# Altium PCB MotorCtrPCB.PcbDoc
Units mil, origin at the board's own origin, x right, y up, seen from the top; angles counter-clockwise.
Board outline 2560 x 980 mil, 2 copper layers (Top Layer, Bottom Layer); 38 components, 27 nets, 135 pads, 14 vias.
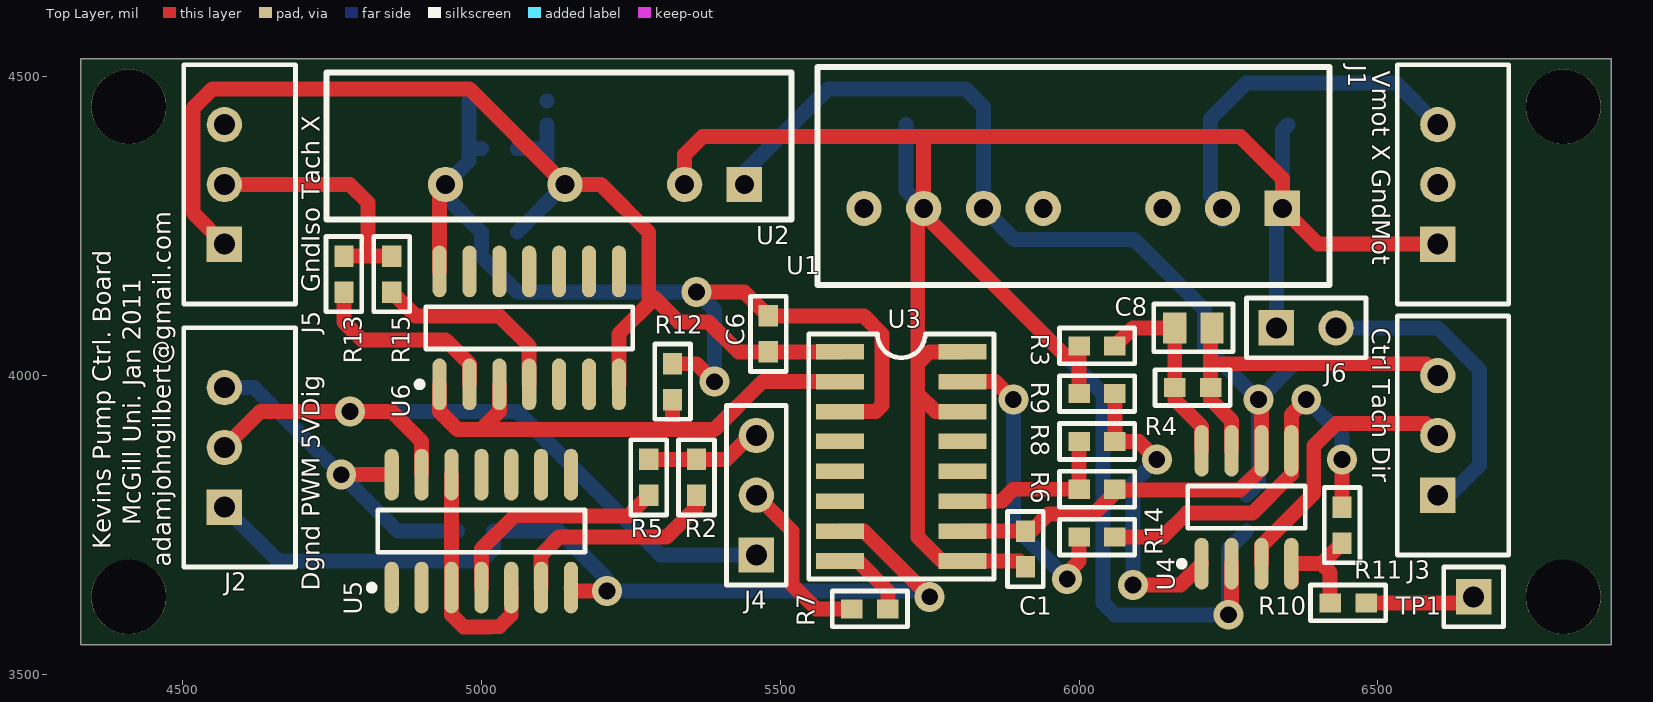
[diagram p0: Top Layer view]
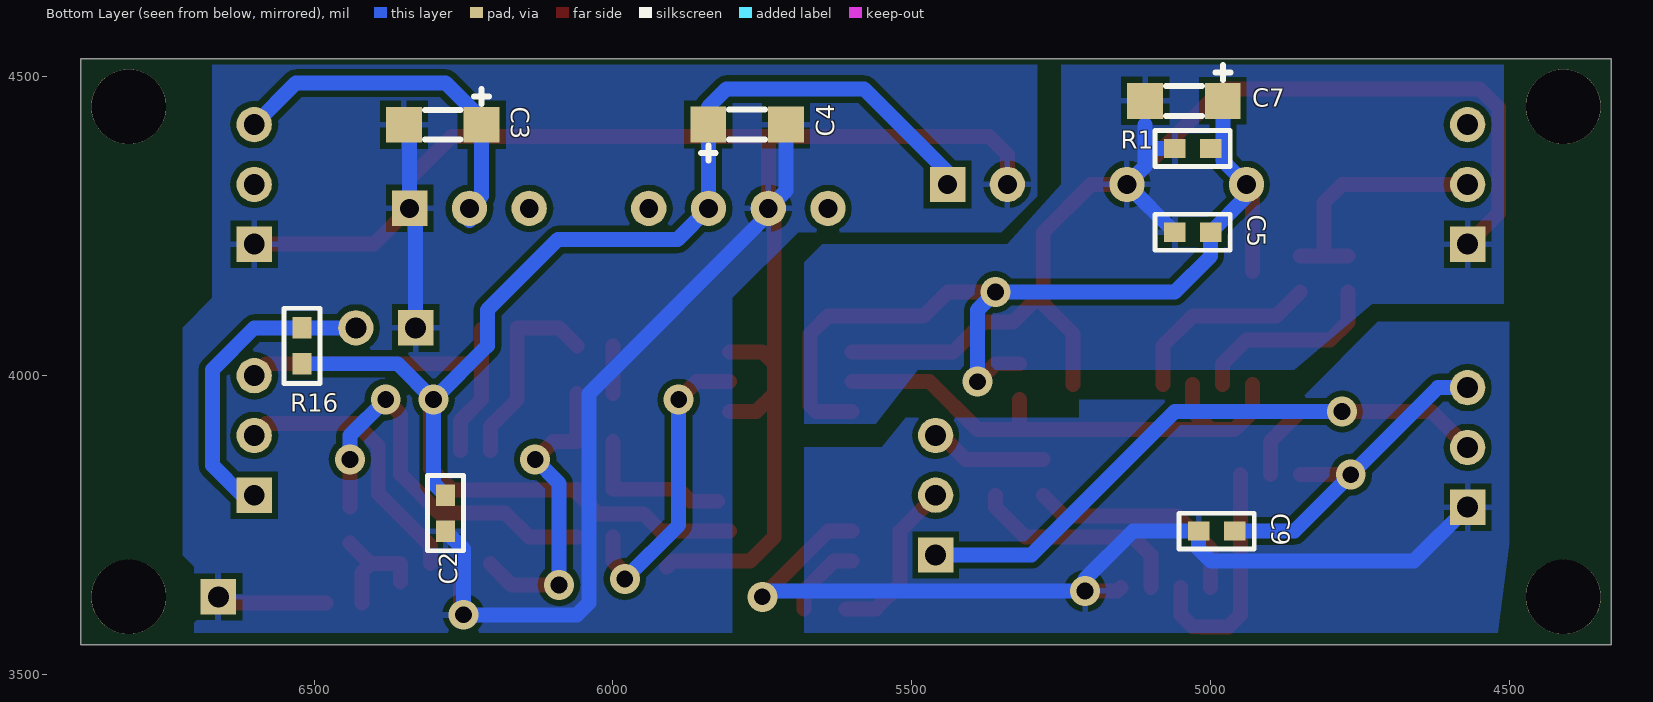
[diagram p1: Bottom Layer view, seen from below]

## Layer stack, top to bottom
Top Layer: signal copper 1.4
Dielectric: dielectric 12.6, FR-4, Dk 4.8
Bottom Layer: signal copper 1.4

## Board outline
4330,4530 4330,3550 6890,3550 6890,4530 4330,4530

## Design rules (kind name [scope] priority, off if disabled: settings)
Clearance [All] p1: gap=10
HoleSize [All] p1: absolutevalues=TRUE maxlimit=200 minlimit=1 maxpercent=80.000 minpercent=20.000
MinimumSolderMaskSliver [All] p1: minsoldermaskwidth=0
PolygonConnect [All] p1: connectstyle=Relief reliefconductorwidth=10 reliefentries=4 polygonreliefangle="90 Angle"
RoomDefinition MotorCtrl [InComponentClass('MotorCtrl')] p1: confinementstyle=ConfineIn formatcopy=TRUE lockcomponents=FALSE outline 4260,3490 6940,3490 6940,4580 4260,4580
RoutingVias [All] p1: holewidth=28 width=50 viastyle="Through Hole" minholewidth=28 minwidth=50 maxholewidth=28 maxwidth=50
SilkToSilkClearance [All] p1: silktosilkclearance=0
SilkscreenOverComponentPads [All] p1: minsilkscreentomaskgap=0
SolderMaskExpansion [All] p1: expansion=4
Width [All] p1: maxlimit=100 minlimit=10 preferedwidth=25
24 further rules are at their usual default settings.

## Components (designator, comment, footprint, x,y, rotation, side; value= is the part's Value field where it differs from the comment)
C1 "0.01uF" 0603 5910,3680 r90 top
C2 "0.01uF" 0603 6280,3740 r90 bottom
C3 "1uF x 50V" TANTA 6220,4420 r0 bottom
C4 "1uF x 50V" TANTA 5840,4420 r180 bottom
C5 "0.01uF" 0603 5060,4240 r180 bottom
C6 "0.01uF" 0603 5480,4040 r90 top
C7 "1uF x 50V" TANTA 4980,4460 r0 bottom
C8 "10uF" 0805 6160,4080 r0 top
C9 "0.01uF" 0603 5020,3740 r180 bottom
J1 "MolexHDR3" HDR1X3_MolexVertical 6600,4220 r90 top
J2 "MolexHDR3" HDR1X3_MolexVertical 4570,3780 r90 top
J3 "MolexHDR3" HDR1X3_MolexVertical 6600,3800 r90 top
J4 "Header 3" HDR1X3 5460,3700 r90 top
J5 "MolexHDR3" HDR1X3_MolexVertical 4570,4220 r90 top
J6 "Header2" HDR1X2 6330,4080 r0 top
R1 "Res0603" 0603 5000,4380 r0 bottom
R2 "Res0603" 0603 5360,3800 r90 top
R3 "Res0603" 0603 6000,4050 r0 top
R4 "Res0603" 0603 6160,3980 r0 top
R5 "Res0603" 0603 5280,3800 r90 top
R6 "Res0603" 0603 6000,3810 r0 top
R7 "Res0603" 0603 5680,3610 r180 top
R8 "Res0603" 0603 6000,3890 r0 top
R9 "Res0603" 0603 6000,3970 r0 top
R10 "Res0603" 0603 6420,3620 r0 top
R11 "Res0603" 0603 6440,3780 r270 top
R12 "Res0603" 0603 5320,3960 r90 top
R13 "Res0603" 0603 4770,4200 r270 top
R14 "Res0603" 0603 6000,3730 r0 top
R15 "Res0603" 0603 4850,4200 r270 top
R16 "Res0603" 0603 6520,4080 r270 bottom
TP1 "Header1" HDR1 6660,3630 r90 top
U1 "Isolated24V-5VDCDC Recom RS-2405S" RECOM_RS-2405S 6340,4280 r180 top
U2 "Isolated5VDCDC Recom RE-0505S" RECOM_DCDC_SIP 5440,4320 r180 top
U3 "ACSL-6410" SO16 5600,4040 r0 top
U4 "LT1013IS8" S8_N 6280,3780 r90 top
U5 "SN74AC04D" D014_N 5000,3740 r90 top
U6 "SN74AC04D" D014_N 5080,4080 r90 top

## Footprints (in the part's own frame and the unit in brackets; to place one, negate y for a bottom-side part, rotate by r counter-clockwise, add the part's x,y. Pads: shape width x height; smd on the part's side, far side on the other; paste and mask are expansions set on the pad)
0603 [mil]
  rect 36x32 smd: 1(0,0) 2(60,0)
  silkscreen extent -33,-30 93,30
0805 [mil]
  rect 38.5x52 smd: 1(0,0) 2(62.5,0)
  silkscreen extent -35,-40 98,40
D014_N [mm] "SOIC, 14-Leads, Body 8.7x3.9mm, Pitch 1.27mm, IPC Medium Density"
  oval 2.2x0.6 smd: 1(-2.4,3.81) 2(-2.4,2.54) 3(-2.4,1.27) 4(-2.4,0) 5(-2.4,-1.27) 6(-2.4,-2.54) 7(-2.4,-3.81) 8(2.4,-3.81) 9(2.4,-2.54) 10(2.4,-1.27) 11(2.4,0) 12(2.4,1.27) 13(2.4,2.54) 14(2.4,3.81)
  silkscreen extent -2.52,-4.4 0.9,4.78, body extent -1.95,-4.33 1.95,4.33, height 1.75
HDR1 [mm]
  rect 1.5x1.5 hole 0.889: 1(0,0)
  silkscreen extent -1.27,-1.27 1.27,1.27
HDR1X2 [mm]
  rect 1.5x1.5 hole 0.889: 1(0,0)
  round 1.5 hole 0.889: 2(2.54,0)
  silkscreen extent -1.27,-1.27 3.81,1.27
HDR1X3 [mm]
  rect 1.5x1.5 hole 0.889: 1(0,0)
  round 1.5 hole 0.889: 2(2.54,0) 3(5.08,0)
  silkscreen extent -1.27,-1.27 6.35,1.27
HDR1X3_MolexVertical [mm]
  rect 1.5x1.5 hole 0.889: 1(0,0)
  round 1.5 hole 0.889: 2(2.54,0) 3(5.08,0)
  silkscreen extent -2.54,-3.02 7.62,1.73
RECOM_DCDC_SIP [mm] "DC-DC Converter"
  rect 1.5x1.5 hole 0.8: 1(0,0)
  round 1.5 hole 0.8: 2(2.54,0) 4(7.62,0) 6(12.7,0)
  silkscreen extent -2,-4.75 17.75,1.5
RECOM_RS-2405S [mm] "DC-DC Converter"
  rect 1.5x1.5 hole 0.8: 1(0,0)
  round 1.5 hole 0.8: 2(2.54,0) 3(5.08,0) 5(10.16,0) 6(12.7,0) 7(15.24,0) 8(17.78,0)
  silkscreen extent -2,-6 19.75,3.25
S8_N [mm] "SOIC, 8-Leads, Body 4.9x3.9mm, Pitch 1.27mm, IPC Medium Density"
  oval 2.2x0.6 smd: 1(-2.4,1.905) 2(-2.4,0.635) 3(-2.4,-0.635) 4(-2.4,-1.905) 5(2.4,-1.905) 6(2.4,-0.635) 7(2.4,0.635) 8(2.4,1.905)
  silkscreen extent -2.52,-2.5 0.9,2.88, body extent -2,-2.5 2,2.5, height 1.76
SO16 [mil]
  rect 80x26 smd: 1(0,0) 2(0,-50) 3(0,-100) 4(0,-150) 5(0,-200) 6(0,-250) 7(0,-300) 8(0,-350) 9(205,-350) 10(205,-300) 11(205,-250) 12(205,-200) 13(205,-150) 14(205,-100) 15(205,-50) 16(205,0)
  silkscreen extent -52,-380 258,30
TANTA [mil]
  rect 60x60 smd: 1(-0.4,0.18) 2(129.6,0.18)
  silkscreen extent -13,-60 95,25

## Part data
C1 C2 C5 C6 C8 C9: library part Cap0603, "Capacitor, Ceramic, 0603"
C3 C4 C7: library part CAP_POL
J1 J2 J3 J5: library part HDR3_Molex
J4: "Header, 0.1\"  3-Pin straight"
R1 R2 R3 R4 R5 R6 R7 R8 R9 R10 R11 R12 R13 R14 R15 R16: "Resistor"
TP1: "TestPoint1"
U1: library part "Recom RS-2405S", "18-36V input, 5V output"
U2: library part "Recom RE-0505S", "Isolated 6V DC-DC"
U3: "4-Ch, Bi-Dir (3/1), 15 MBd Digital Logic Gate Optocoupler"
U4: "Dual Precision Operational Amplifier"
U5 U6: "Hex Inverter"

## Free pads (board coordinates)
  round 125 hole 125: 0(4410,3630) 0(4410,4450) 0(6810,3630) 0(6810,4450)

## Via types
v1: diameter 50, hole 28, Top Layer to Bottom Layer, 14 vias

## Nets (pads, with @x,y where several pads share a name; then routed paths per layer and width w, separated by ;. In a path a pad name is that pad's centre, name@x,y a point inside that pad or via, vN(x,y) a via of type N, cw(c..) or ccw(c..) an arc to the next point about the centre after c; other vN are vias at no path point)
5VDIG: C9.2 J2.3 U5.14 | length 573.9
  Top Layer w25: v1(4765.51,3834.49) U5.14
  Bottom Layer w25: J2.3 4620,3980 v1(4765.51,3834.49) 4860,3740 C9.2
5VISOLATED: C5.2 C6.2 C7.1 R1.1 R12.2 U2.6 U3.3 U6.14 | length 1634
  Top Layer w25: U6.14 4930,4310 U2.6 ; R12.2 5360,4020 v1(5390,3990) ; v1(5360,4140) 5440,4140 C6.2 5640,4100 5670,4070 5670,3950 5660,3940 U3.3
  Bottom Layer w25: C7.1 4979.6,4380 ; R1.1 4979.6,4380 ; v1(5390,3990) 5390,4110 v1(5360,4140) 5060,4140 5000,4200 C5.2 4940,4300 U2.6 4979.6,4359.6 4979.6,4380
5VMOTOR: C1.2 C2.2 C4.1 R6.2 R16.2 U1.6 U2.1 U3.10 U4.6 | length 2381.1
  Top Layer w25: U3.10 C1.2 5920,3740 5948.5,3768.5 6024.32,3768.5 6060,3804.18 R6.2 6061.32,3808.68 6269.21,3808.68 6305,3844.47 U4.6 6305,3955 v1(6300,3960)
  Bottom Layer w25: U2.1 5440,4340 5580,4480 5810,4480 5840.4,4449.6 C4.1 5840.4,4280.4 U1.6 5892.03,4227.97 6092.03,4227.97 6210,4110 6210,4050 v1(6300,3960) ; C2.2 6300,3820 6300,3950 6310,3960 v1(6300,3960) ; R16.2 6360,4020 v1(6300,3960)
DGND: C9.1 J2.1 U3.7 U5.7 | length 1549.5
  Top Layer w25: U5.7 5155.51,3640 v1(5210,3640) ; U3.7 5640,3740 v1@5735,3645
  Bottom Layer w25: J2.1 4660,3690 5000,3690 5020,3710 C9.1 5130,3740 5210,3660 v1(5210,3640) 5740,3640 v1(5750,3630)
GNDISOLATED: C5.1 C6.1 C7.2 J5.1 R1.2 U2.4 U3.1 U6.7 | length 2036.8
  Top Layer w25: J5.1 4517.97,4272.03 4517.97,4447.97 4550,4480 4980,4480 U2.4 5200,4320 5280,4240 5280,4120 ; U6.7 5230,4070 5290,4130 5330,4090 5380,4090 5430,4040 U3.1
  Bottom Layer w25: C5.1 U2.4 5109.6,4350.4 5109.6,4380 ; R1.2 5109.6,4380 ; 5109.6,4419.82 5109.6,4380 ; C7.2 5109.6,4459.6 C7.2@5110,4460
GNDMOTOR: C1.1 C2.1 C3.2 C4.2 J1.1 J6.1 R3.1 R9.1 R10.2 TP1.1 U1.1 U1.7 U2.2 U3.9 U3.14 U3.16 U4.2 | length 4825.3
  Top Layer w25: U2.2 5340,4370 5370,4400 5740,4400 ; U3.14 5760,3940 5730,3970 ; U3.16 5750,4040 5730,4020 ; C1.1 5900,3690 U3.9 5770.18,3690 5730,3730.18 5730,3970 ; 5980,4030 U1.7@5735,4275 ; R9.1 R3.1 ; v1(6250,3600) 6255,3605 U4.2 ; R10.2 6650,3620 TP1.1 ; J1.1 6400,4220 U1.1 6340,4330 6270,4400 5740,4400 ; 5730,3970 5730,4020 ; 5730,4020 5730,4270 U1.7@5735,4275 ; U1.7@5735,4275 U1.7 5740,4400
  Bottom Layer w25: C4.2 5710.4,4309.6 U1.7 5740,4270 6040,3970 6040,3620 6060,3600 v1(6250,3600) 6250,3710 C2.1 ; J6.1 6330,4270 U1.1 6340,4410.22 C3.2
MOTORCTRL: C8.2 J3.3 R4.2 U4.7 | length 605.8
  Top Layer w25: C8.2@6220,4077.5 6220,4020 ; U4.7 6255,3925 6220,3960 R4.2 6220,4020 ; J3.3 6580,4020 6220,4020
MOTORDIR: J3.1 J6.2 R16.1 | length 519.7
  Bottom Layer w25: J6.2 R16.1 6600,4080 6670,4010 6670,3850 6620,3800 J3.1
MOTORTACH: J3.2 U4.3 | length 464.5
  Top Layer w25: U4.3 6305,3715.53 6392.5,3803.03 6392.5,3882.5 6430,3920 6580,3920 J3.2
NetC8_1: C8.1 R3.2 R4.1 U4.8 | length 336.6
  Top Layer w25: R3.2 6090,4080 C8.1 R4.1 6160,3960 6205,3915 U4.8
NetJ4_2: J4.2 R7.2 | length 281.4
  Top Layer w25: J4.2 5520,3740 5520,3650 5560,3610 R7.2@5610,3610
NetJ4_3: J4.3 R2.2 R5.2 | length 196.6
  Top Layer w25: R5.2 R2.2 5410,3860 5450,3900 J4.3
NetR2_1: R2.1 U5.6 | length 367.6
  Top Layer w25: U5.6 5100,3700 5130,3730 5310,3730 5360,3780 R2.1
NetR5_1: R5.1 U5.4 | length 381.8
  Top Layer w25: U5.4 5000,3710 5055,3765 5245,3765 R5.1
NetR6_1: R6.1 R8.1 U3.11 | length 263.3
  Top Layer w25: U3.11@5825,3790 5870,3790 5890,3810 R6.1 R8.1
NetR7_1: R7.1 U3.8 | length 130.7
  Top Layer w25: U3.8 5630,3690 5680,3640 R7.1
NetR8_2: R8.2 R9.2 U4.1 | length 518.7
  Top Layer w25: R9.2 R8.2 6100,3890 v1(6130,3860) ; v1(6090,3650) 6169.49,3650 U4.1
  Bottom Layer w25: v1(6090,3650) 6090,3820 v1(6130,3860)
NetR10_1: R10.1 R11.2 U4.4 | length 211.8
  Top Layer w25: U4.4@6355,3655 U4.4 ; U4.4@6365.51,3685.51 U4.4 ; R10.1 6420,3671.02 6405.51,3685.51 ; R11.2 6405.51,3685.51 ; U4.4 6405.51,3685.51
NetR11_1: R11.1 R14.2 U4.5 | length 678.7
  Top Layer w25: R14.2 6140,3730 6180,3770 6290,3770 6355,3835 U4.5 6355,3935 v1(6380,3960) ; R11.1 v1(6440,3860)
  Bottom Layer w25: v1(6380,3960) 6440,3900 v1(6440,3860)
NetR12_1: R12.1 U3.2 U6.1 U6.3 | length 899
  Top Layer w25: U6.1 4930,3940 4960,3910 5000,3910 ; U6.3 5030,3940 5000,3910 ; R12.1 5320,3910 ; U3.2 5470,3990 5390,3910 5320,3910 ; 5000,3910 5320,3910
NetR13_2: R13.2 U6.2 | length 323.5
  Top Layer w25: R13.2 4770,4090 4800,4060 4940,4060 4980,4020 U6.2
NetR14_1: R14.1 U3.15 | length 513
  Top Layer w25: U3.15 5860,3990 v1(5890,3960) ; v1(5980,3660) 5980,3670 6000,3690 R14.1
  Bottom Layer w25: v1(5890,3960) 5890,3750 v1(5980,3660)
NetR15_2: R15.2 U6.4 | length 331.8
  Top Layer w25: R15.2 4890,4100 5030,4100 5080,4050 U6.4
NetU5_3: U5.3 U5.5 U5.12 | length 396.8
  Top Layer w25: U5.12 U5.3 4950,3600 4970.3,3579.7 5014.21,3579.7 5014.51,3580 5030,3580 5050,3600 U5.5
PWM: J2.2 J4.1 U5.13 | length 1210.5
  Top Layer w25: J2.2 4630,3940 4850,3940 4900,3890 U5.13
  Bottom Layer w25: v1(4780,3940) 5060,3940 5300,3700 J4.1
TACH: J5.2 R13.1 R15.1 | length 422.4
  Top Layer w25: J5.2 4780,4320 4810,4290 4810,4200 ; R13.1 4810,4200 ; R15.1 4810,4200
VMOTOR: C3.1 J1.3 U1.2 | length 612.5
  Bottom Layer w25: U1.2@6240,4260 U1.2 6219.6,4300.4 C3.1 6219.6,4429.6 6280,4490 6530,4490 J1.3
pads on no net: J1.2 J5.3 U1.3 U1.5 U1.8 U3.4 U3.5 U3.6 U3.12 U3.13 U5.1 U5.2 U5.8 U5.9 U5.10 U5.11 U6.5 U6.6 U6.8 U6.9 U6.10 U6.11 U6.12 U6.13

## Polygon pours and split planes (outlines as drawn)
DGND on Bottom Layer "TopOverlay-No Net" (solid, pour order 1001): 5680,3880 5550,3880 5510,3930 5220,3930 5220,3960 4850,3960 4720,4090 4500,4090 4500,3720 4520,3570 5680,3570
GNDMOTOR on Bottom Layer "TopOverlay-No Net" (solid, pour order 1002): 6670,4520 6670,4130 6720,4080 6720,3700 6700,3680 6700,3570 5800,3570 5800,4130 5690,4240 5350,4240 5290,4300 5290,4520
GNDISOLATED on Bottom Layer "TopOverlay-No Net" (solid, pour order 1000): 4510,4120 4730,4120 4860,4010 5490,4010 5560,3920 5680,3920 5680,4190 5650,4220 5340,4220 5250,4320 5250,4520 4510,4520

## Silkscreen, mask and mechanical layers (free items; w line width, h text height)
Top Overlay:
  text "Vmot X GndMot" at 6490,4510 h30 r270
  text "GndIso Tach X" at 4730,4140 h30 r90
  text "Ctrl Tach Dir" at 6490,4080 h30 r270
  text "McGill Uni. Jan 2011" at 4430,3750 h30 r90
  text "Kevins Pump Ctrl. Board" at 4380,3710 h30 r90
  text "adamjohngilbert@gmail.com" at 4480,3680 h30 r90
  text "Dgnd PWM 5VDig" at 4730,3640 h30 r90